# Altium PCB ramp_and_pwm_final.PcbDoc
Units mm, origin at the board's own origin, x right, y up, seen from the top; angles counter-clockwise.
Board outline 69.47 x 58.04 mm, 2 copper layers (Top Layer, Bottom Layer); 15 components, 14 nets, 43 pads, 0 vias.
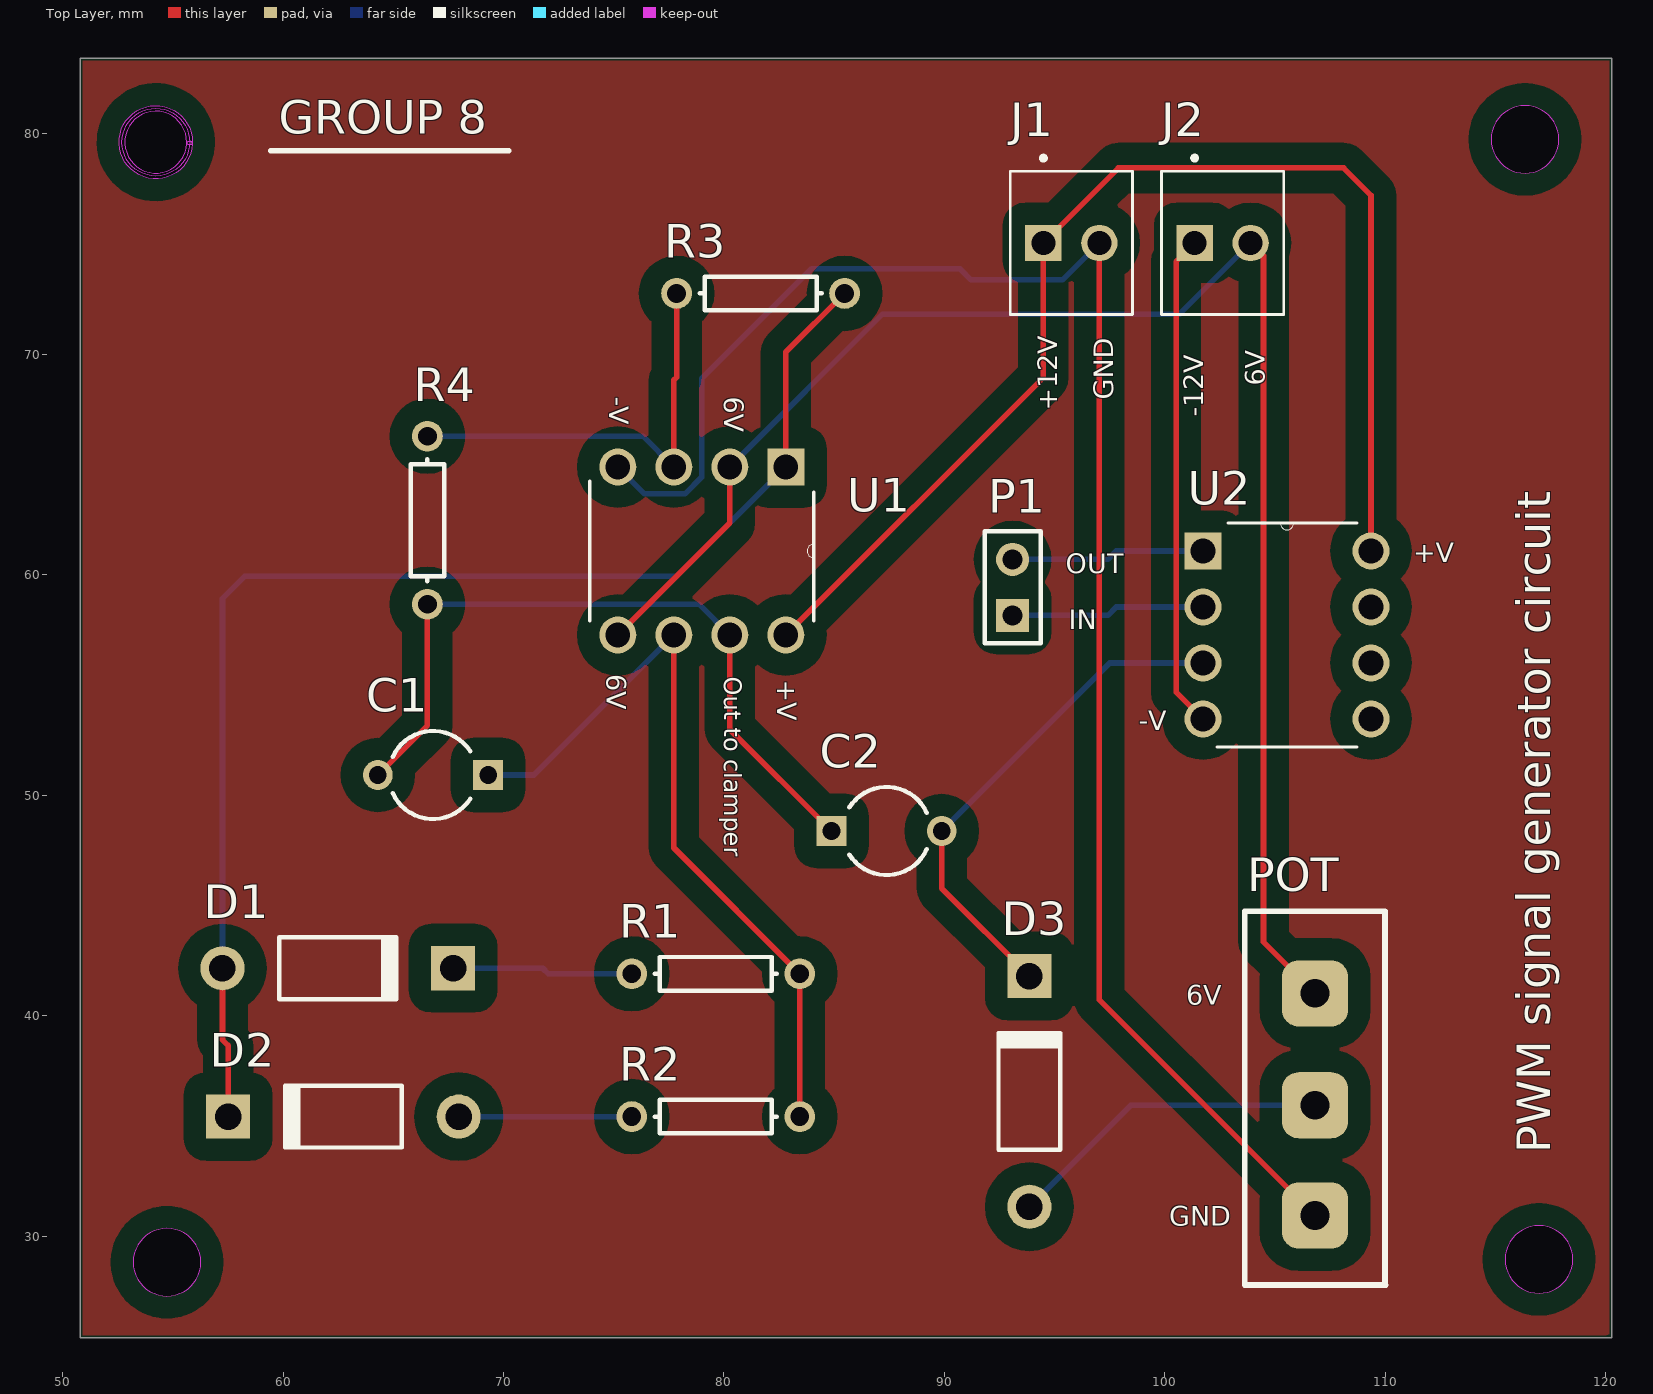
[diagram p0: Top Layer view]
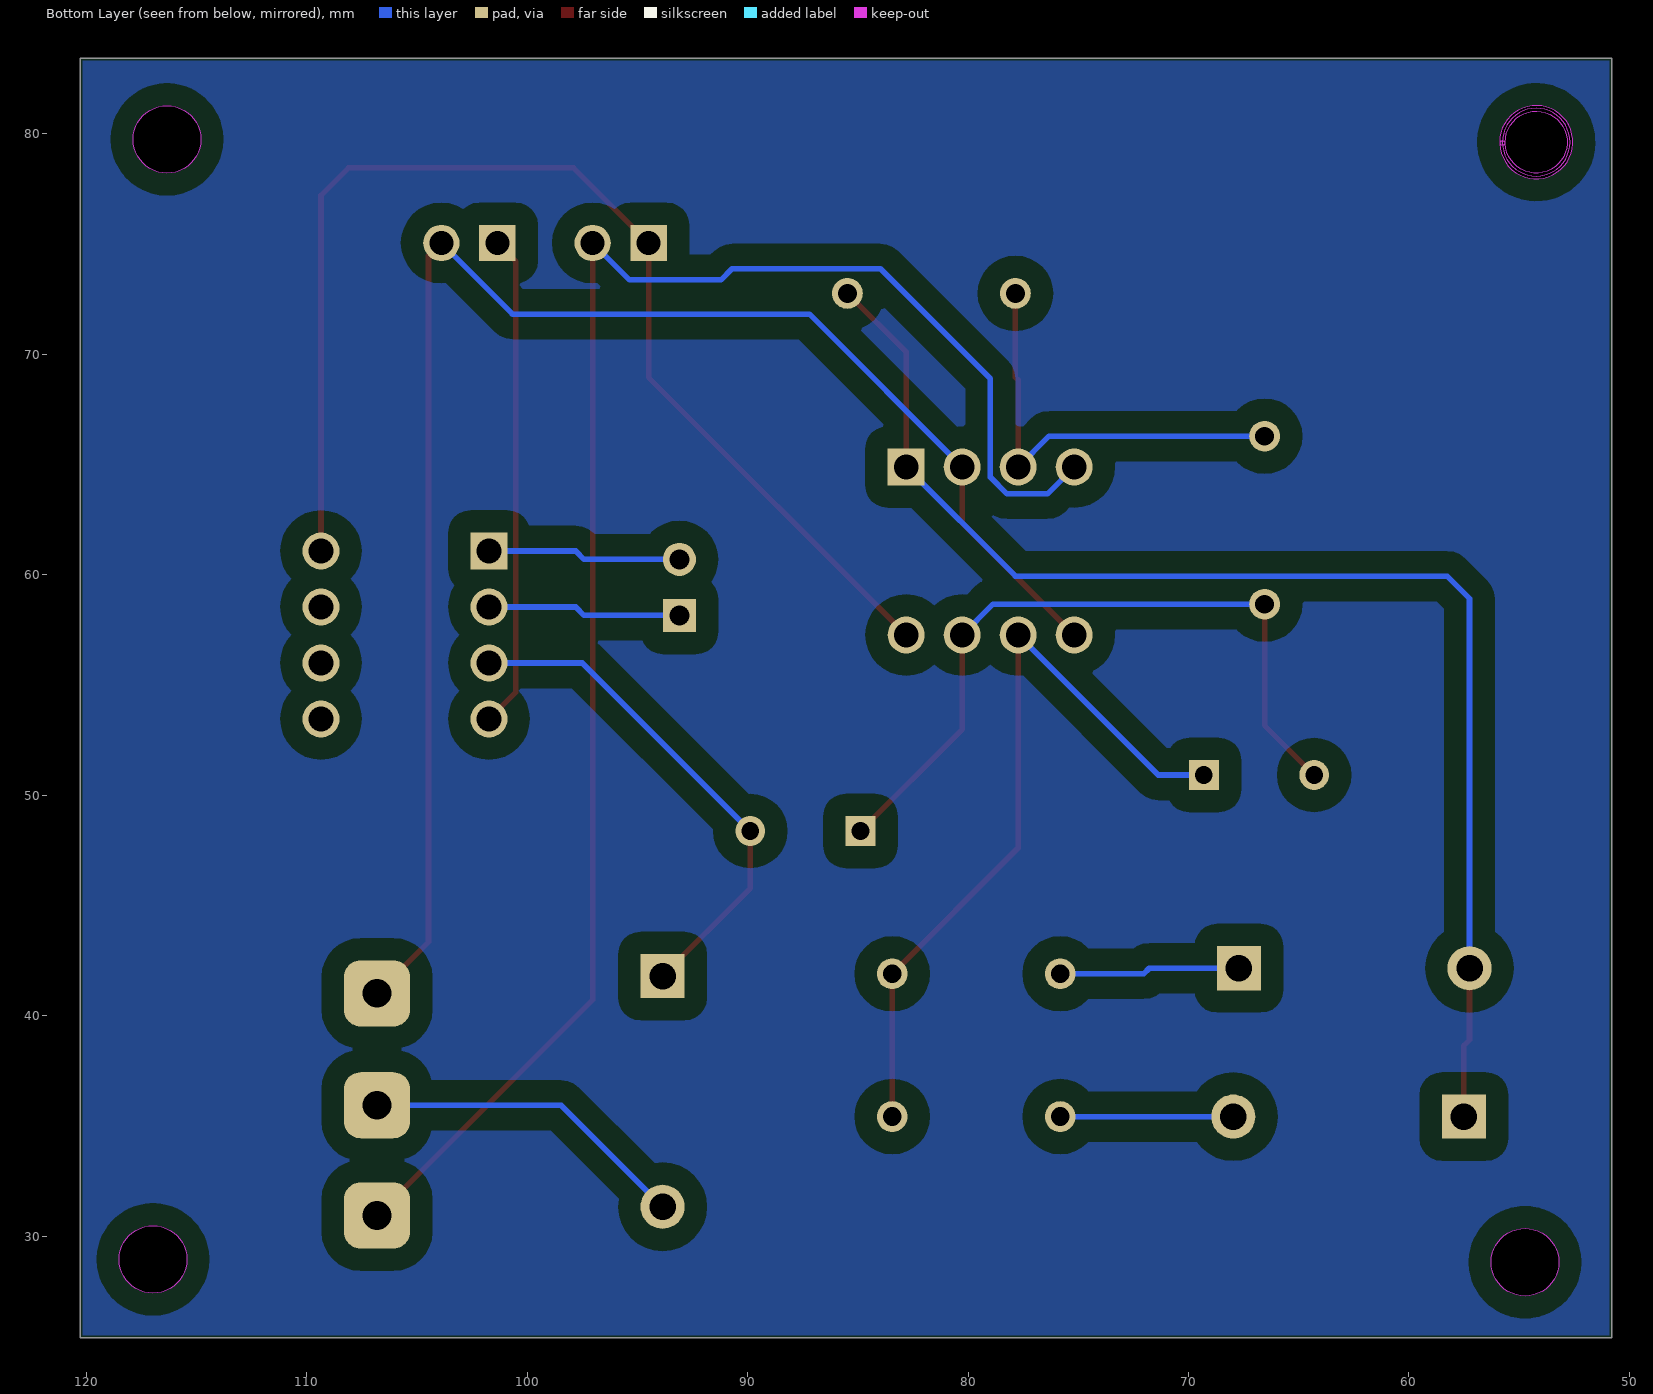
[diagram p1: Bottom Layer view, seen from below]

## Layer stack, top to bottom
Top Solder: solder mask 0.0102, Solder Resist, Dk 3.5
Top Layer: signal copper 0.0356
Dielectric 1: dielectric 0.32, FR-4, Dk 4.8
Bottom Layer: signal copper 0.0356
Bottom Solder: solder mask 0.0102, Solder Resist, Dk 3.5

## Board outline
50.8,25.4 120.269,25.4 120.269,83.439 50.8,83.439
cut-out: 55.889,79.55 cw(c54.229,79.629) 55.891,79.629 cw(c55.764,79.629) 55.636,79.629 ccw(c54.229,79.629) 55.635,79.562 cw(c55.762,79.556) 55.889,79.556 cw(c55.762,79.556)
cut-out: 55.889,79.55 cw(c54.229,79.629) 55.891,79.629 cw(c55.764,79.629) 55.636,79.629 ccw(c54.229,79.629) 55.635,79.562 cw(c55.762,79.556) 55.889,79.556 cw(c55.762,79.556)
cut-out: 55.889,79.55 cw(c54.229,79.629) 55.891,79.629 cw(c55.764,79.629) 55.636,79.629 ccw(c54.229,79.629) 55.635,79.562 cw(c55.762,79.556) 55.889,79.556 cw(c55.762,79.556)
cut-out: 54.229,78.094 cw(c54.229,79.629) 52.694,79.629 cw(c54.229,79.629) 54.229,81.164 cw(c54.229,79.629) 55.764,79.629 cw(c54.229,79.629)
cut-out: 53.202,28.829 ccw(c54.737,28.829) 54.737,27.294 ccw(c54.737,28.829) 56.272,28.829 ccw(c54.737,28.829) 54.737,30.364 ccw(c54.737,28.829)
cut-out: 115.432,28.956 ccw(c116.967,28.956) 116.967,27.421 ccw(c116.967,28.956) 118.502,28.956 ccw(c116.967,28.956) 116.967,30.491 ccw(c116.967,28.956)
cut-out: 114.797,79.756 ccw(c116.332,79.756) 116.332,78.221 ccw(c116.332,79.756) 117.867,79.756 ccw(c116.332,79.756) 116.332,81.291 ccw(c116.332,79.756)

## Design rules (kind name [scope] priority, off if disabled: settings)
Clearance [All] p1: gap=0.254 ignorepadtopadclearanceinfootprint=FALSE except(0: Arc-Hole Track-Hole SMDPad-Hole THPad-Hole Via-Hole Fill-Hole Poly-Hole Region-Hole Text-Hole; 1: Arc-Fill Arc-Poly Arc-Region Track-Fill Track-Poly Track-Region SMDPad-Fill SMDPad-Poly SMDPad-Region THPad-Fill THPad-Poly THPad-Region Via-Fill Via-Poly Via-Region Fill-Fill Fill-Poly Fill-Region Poly-Poly Poly-Region Region-Region)
PolygonConnect [All] p1: connectstyle=Relief reliefconductorwidth=0.254 reliefentries=4 polygonreliefangle="90 Angle" airgapwidth=0.254
RoutingVias [All] p1: holewidth=0.711 width=1.27 viastyle="Through Hole" minholewidth=0.711 minwidth=1.27 maxholewidth=0.711 maxwidth=1.27
SolderMaskExpansion [All] p1: expansion=0.102
Width [All] p1: maxlimit=0.254 minlimit=0.254 preferedwidth=0.254
30 further rules are at their usual default settings.

## Classes and differential pairs
component class lab: C1 C2 D1 D2 D3 J1 J2 P1 R1 R2 R3 R4 U1 U2

## Components (designator, comment, footprint, x,y, rotation, side; value= is the part's Value field where it differs from the comment)
C1 "Cap2" CAPR5-4X5 66.802,50.927 r180 top value=3.3nF
C2 "Cap2" CAPR5-4X5 87.376,48.387 r0 top value=1uF
D1 "Diode 1N4001" DO-41 62.484,42.164 r0 top
D2 "Diode 1N4001" DO-41 62.738,35.433 r180 top
D3 "Diode 1N4001" DO-41 93.853,36.576 r90 top
J1 "1546215-2" *TE_1546215-2 95.758,75.057 r0 top
J2 "1546215-2" *TE_1546215-2 102.616,75.057 r0 top
P1 "Header 2" HDR1X2 93.091,58.166 r90 top
POT "POT" POT 106.807,44.346 r0 top (schematic designator P2)
R1 "Res1" AXIAL-0.3 79.629,41.91 r0 top value=10K
R2 "Res1" AXIAL-0.3 79.629,35.433 r0 top value=47K
R3 "Res1" AXIAL-0.3 81.661,72.771 r0 top value=100K
R4 "Res1" AXIAL-0.3 66.548,62.484 r270 top value=47K
U1 "LF353N" *DIP254P762X508-8 75.184,57.277 r270 top
U2 "LF353N" *DIP254P762X508-8 109.347,53.467 r0 top

## Footprints (in the part's own frame and the unit in brackets; to place one, negate y for a bottom-side part, rotate by r counter-clockwise, add the part's x,y. Pads: shape width x height; smd on the part's side, far side on the other; paste and mask are expansions set on the pad)
*DIP254P762X508-8 [mil]
  rect 66x66 hole 44: 1(-300,300)
  round 66 hole 44: 2(-300,200) 3(-300,100) 4(-300,0) 5(0,0) 6(0,100) 7(0,200) 8(0,300)
  silkscreen extent -275,-50 -25,350
*TE_1546215-2 [mm]
  rect 1.65x1.65 hole 1.1: 1(-1.27,0)
  round 1.65 hole 1.1: 2(1.27,0)
  silkscreen extent -2.77,-3.25 2.77,3.95
AXIAL-0.3 [mm] "Axial Device, Thru-Hole; 2 Leads; 0.3 in Pin Spacing"
  round 1.4 hole 0.85: 1(-3.81,0) 2(3.81,0)
  silkscreen extent -2.77,-0.76 2.77,0.76
CAPR5-4X5 [mm] "Capacitor; 2 Leads"
  rect 1.35x1.35 hole 0.8: 1(-2.5,0)
  round 1.35 hole 0.8: 2(2.5,0)
  silkscreen extent -1.69,-2 1.82,2
DO-41 [mm] "Diode, Axial; Body 5.2 x 2.7 mm (LxDia. max), Lead Dia. 0.86 mm (max)"
  round 2 hole 1.2: 1(-5.23,0)
  rect 2x2 hole 1.2: 2(5.23,0)
  silkscreen extent -2.65,-1.4 2.75,1.4
HDR1X2 [mm] "Connector; Header; 2 Position"
  rect 1.5x1.5 hole 0.9: 1(0,0)
  round 1.5 hole 0.9: 2(2.54,0)
  silkscreen extent -1.27,-1.27 3.81,1.27
POT [mm]
  rrect50% 3x3 hole 1.3: 1(0,-3.325) 2(0,-8.4) 3(0,-13.4)
  silkscreen extent -3.19,-16.55 3.2,0.4

## Part data
C1 C2: "Capacitor", PackageDescription="Capacitor; 2 Leads", PackageReference=CAPR5-4X5, Published=23-Sep-2002, Publisher="Altium Limited"
D1 D2 D3: "1 Amp General Purpose Rectifier", Code_JEDEC=DO-204-AL, ComponentLink1Description="Manufacturer Link", ComponentLink1URL=http://www.fairchildsemi.com/, ComponentLink2Description=Datasheet, ComponentLink2URL=http://www.fairchildsemi.com/ds/1N%2F1N4001.pdf, DatasheetVersion=1998, LatestRevisionDate=17-Jul-2002, LatestRevisionNote="Re-released for DXP Platform.", PackageDescription="Diode, Axial; Body 5.2 x 2.7 mm (LxDia. max), Lead Dia. 0.86 mm (max)", PackageReference=DO-41, PackageVersion=Aug-1999, Published=8-Jun-2000, Publisher="Altium Limited"
J1 J2: "TERMI-BLOK PCB MOUNT, 90 2P.", Package=None, Availability=Unavailable, EU_RoHS_Compliance="Compliant with Exemptions", MF="TE Connectivity", MP=1546215-2, Price=None, SnapEDA_Link=https://www.snapeda.com/parts/1546215-2/TE%20Connectivity%20AMP%20Connectors/view-part/?ref=snap, TE_purchase_URL=https://www.te.com/usa-en/product-1546215-2.html?te_bu=Cor&te_type=disp&te_campaign=seda_glo_cor-seda-global-disp-prtnr-fy19-seda-model-bom-cta_sma-317_1&elqCampaignId=32493
P1: "Header, 2-Pin", LatestRevisionDate=17-Jul-2002, LatestRevisionNote="Re-released for DXP Platform.", Publisher="Altium Limited"
POT: "JST (JAPAN SOLDERLESS TERMINALS) - B8B-XH-A (LF)(SN) - HEADER, VERTICAL, 8WAY", Manufacturer=JST, Manufacturer Part Number=B8B-XH-A(LF)(SN), Supplier Part Number 1=455-2251-ND, ComponentLink1Description=https://www.verical.com/server-webapp/html/getDatasheet?partID=440408&src-supplier=Verical, ComponentLink1URL=https://www.verical.com/server-webapp/html/getDatasheet?partID=440408&src-supplier=Verical, No of Positions=8, Pitch="2.5 mm", Pricing 1="1=0.36, 10=0.341, 100=0.2387, 500=0.2046, 1000=0.1705, 5000=0.1461, 10000=0.1364 (USD)", Stock 1=29643, Style/Orientation="Straight Header/Plug", Supplier 1=Digi-Key, Termination=Crimp, Type="Shrouded Header"
R1 R2 R3 R4: "Resistor", LatestRevisionDate=17-Jul-2002, LatestRevisionNote="Re-released for DXP Platform.", PackageDescription="Axial Device, Thru-Hole; 2 Leads; 0.3 in Pin Spacing", PackageReference=AXIAL-0.3, Published=8-Jun-2000, Publisher="Altium Limited"
U1 U2: "8 pin Wide Bandwidth Dual JFET Input Operational Amplifier 40 per tube", Package="DIP-8 Texas Instruments", Availability=Unavailable, MF=STMicroelectronics, MP=LF353N, Price=None, SnapEDA_Link=https://www.snapeda.com/parts/LF353N/STMicroelectronics/view-part/?ref=snap

## Nets (pads, with @x,y where several pads share a name; then routed paths per layer and width w, separated by ;. In a path a pad name is that pad's centre, name@x,y a point inside that pad or via, vN(x,y) a via of type N, cw(c..) or ccw(c..) an arc to the next point about the centre after c; other vN are vias at no path point)
NetC1_1: C1.1 R1.2 R2.2 U1.6 | length 35.3
  Top Layer w0.254: U1.6 77.724,47.625 R1.2 R2.2
  Bottom Layer w0.254: C1.1 71.374,50.927 U1.6
NetC1_2: C1.2 C2.1 R4.2 U1.7 | length 33.8
  Top Layer w0.254: C1.2 66.548,53.173 R4.2 ; U1.7 80.264,52.999 C2.1
  Bottom Layer w0.254: R4.2 78.867,58.674 U1.7
NetC2_2: C2.2 D3.2 U2.3 | length 23.2
  Top Layer w0.254: C2.2 89.876,45.783 D3.2
  Bottom Layer w0.254: C2.2 97.496,56.007 U2.3
NetD1_1: D1.1 D2.2 R3.2 U1.1 | length 60.6
  Top Layer w0.254: D1.1 57.254,38.913 57.508,38.659 D2.2 ; U1.1 82.804,70.104 R3.2
  Bottom Layer w0.254: D1.1 57.254,58.928 58.27,59.944 77.851,59.944 U1.1
NetD1_2: D1.2 R1.1 | length 8.2
  Bottom Layer w0.254: D1.2 71.78,42.164 72.034,41.91 R1.1
NetD2_1: D2.1 R2.1 | length 7.9
  Bottom Layer w0.254: D2.1 R2.1
NetD3_1: D3.1 POT.2 | length 14.9
  Bottom Layer w0.254: D3.1 98.453,35.946 POT.2
NetJ1_1: J1.1 U1.8 U2.8 | length 55.5
  Top Layer w0.254: U1.8 94.488,68.961 J1.1 97.892,78.461 108.102,78.461 109.347,77.216 U2.8
NetJ1_2: J1.2 POT.3 U1.4 | length 78.3
  Top Layer w0.254: J1.2 97.028,40.725 POT.3
  Bottom Layer w0.254: U1.4 76.403,63.678 78.232,63.678 78.994,64.44 78.994,68.91 83.972,73.889 90.703,73.889 91.211,73.381 95.352,73.381 J1.2
NetJ2_1: J2.1 U2.4 | length 22.4
  Top Layer w0.254: J2.1 100.508,74.219 100.508,54.686 U2.4
NetJ2_2: J2.2 POT.1 U1.2 U1.5 | length 72.8
  Top Layer w0.254: U1.5 80.264,62.357 U1.2 ; J2.2 104.47,74.473 104.47,43.358 POT.1
  Bottom Layer w0.254: U1.2 87.198,71.831 100.66,71.831 J2.2
NetP1_1: P1.1 U2.2 | length 8.8
  Bottom Layer w0.254: P1.1 97.409,58.166 97.79,58.547 U2.2
NetP1_2: P1.2 U2.1 | length 8.8
  Bottom Layer w0.254: P1.2 97.409,60.706 97.79,61.087 U2.1
NetR3_1: R3.1 R4.1 U1.3 | length 19.7
  Top Layer w0.254: U1.3 77.724,68.834 77.851,68.961 R3.1
  Bottom Layer w0.254: R4.1 76.327,66.294 U1.3
pads on no net: U2.5 U2.6 U2.7

## Polygon pours and split planes (outlines as drawn)
no net on Top Layer "Top Layer-No Net" (solid, pour order 4): 120.142,83.312 120.142,25.4 120.015,25.527 50.927,25.527 50.927,83.312
no net on Bottom Layer "Top Layer-No Net" (solid, pour order 6): 50.927,83.312 120.142,83.312 120.142,25.527 50.927,25.527

## Silkscreen, mask and mechanical layers (free items; w line width, h text height)
Top Overlay:
  lines w0.254: 59.436,79.248 70.231,79.248
  text "GROUP 8" at 59.817,80.01 h1.52
  text "6V" at 104.521,68.58 h0.9 r90
  text "-V" at 74.803,68.072 h0.9 r270
  text "6V" at 80.01,68.072 h0.9 r270
  text "GND" at 97.663,67.945 h0.9 r90
  text "+12V" at 95.123,67.437 h0.9 r90
  text "-12V" at 101.727,67.183 h0.9 r90
  text "+V" at 111.252,60.579 h0.9
  text "OUT" at 95.504,60.071 h0.9
  text "IN" at 95.631,57.531 h0.9
  text "6V" at 74.676,55.499 h0.9 r270
  text "Out to clamper" at 80.01,55.372 h0.8 r270
  text "+V" at 82.423,55.245 h0.9 r270
  text "-V" at 98.806,52.959 h0.9
  text "6V" at 100.965,40.513 h0.9
  text "PWM signal generator circuit" at 117.475,33.782 h1.52 r90
  text "GND" at 100.203,30.48 h0.9
Mechanical 13:
  circle w0.254: c54.737,28.829 r1.535
  circle w0.254: c54.229,79.629 r1.535
  circle w0.254: c116.967,28.956 r1.535
  circle w0.254: c116.332,79.756 r1.535
  pour cut-out: 55.889,79.55 cw(c54.229,79.629) 55.891,79.629 cw(c55.764,79.629) 55.636,79.629 ccw(c54.229,79.629) 55.635,79.562 cw(c55.762,79.556) 55.889,79.556 cw(c55.762,79.556)
  lines w0.254: 50.927,25.527 50.927,83.312 120.142,83.312 120.269,83.439 120.269,25.527 50.927,25.527